# Altium PCB tx_mini.PcbDoc
Units mm, origin at the board's own origin, x right, y up, seen from the top; angles counter-clockwise.
Board outline 29 x 40 mm, 2 copper layers (Top Layer, Bottom Layer); 46 components, 36 nets, 197 pads, 47 vias.
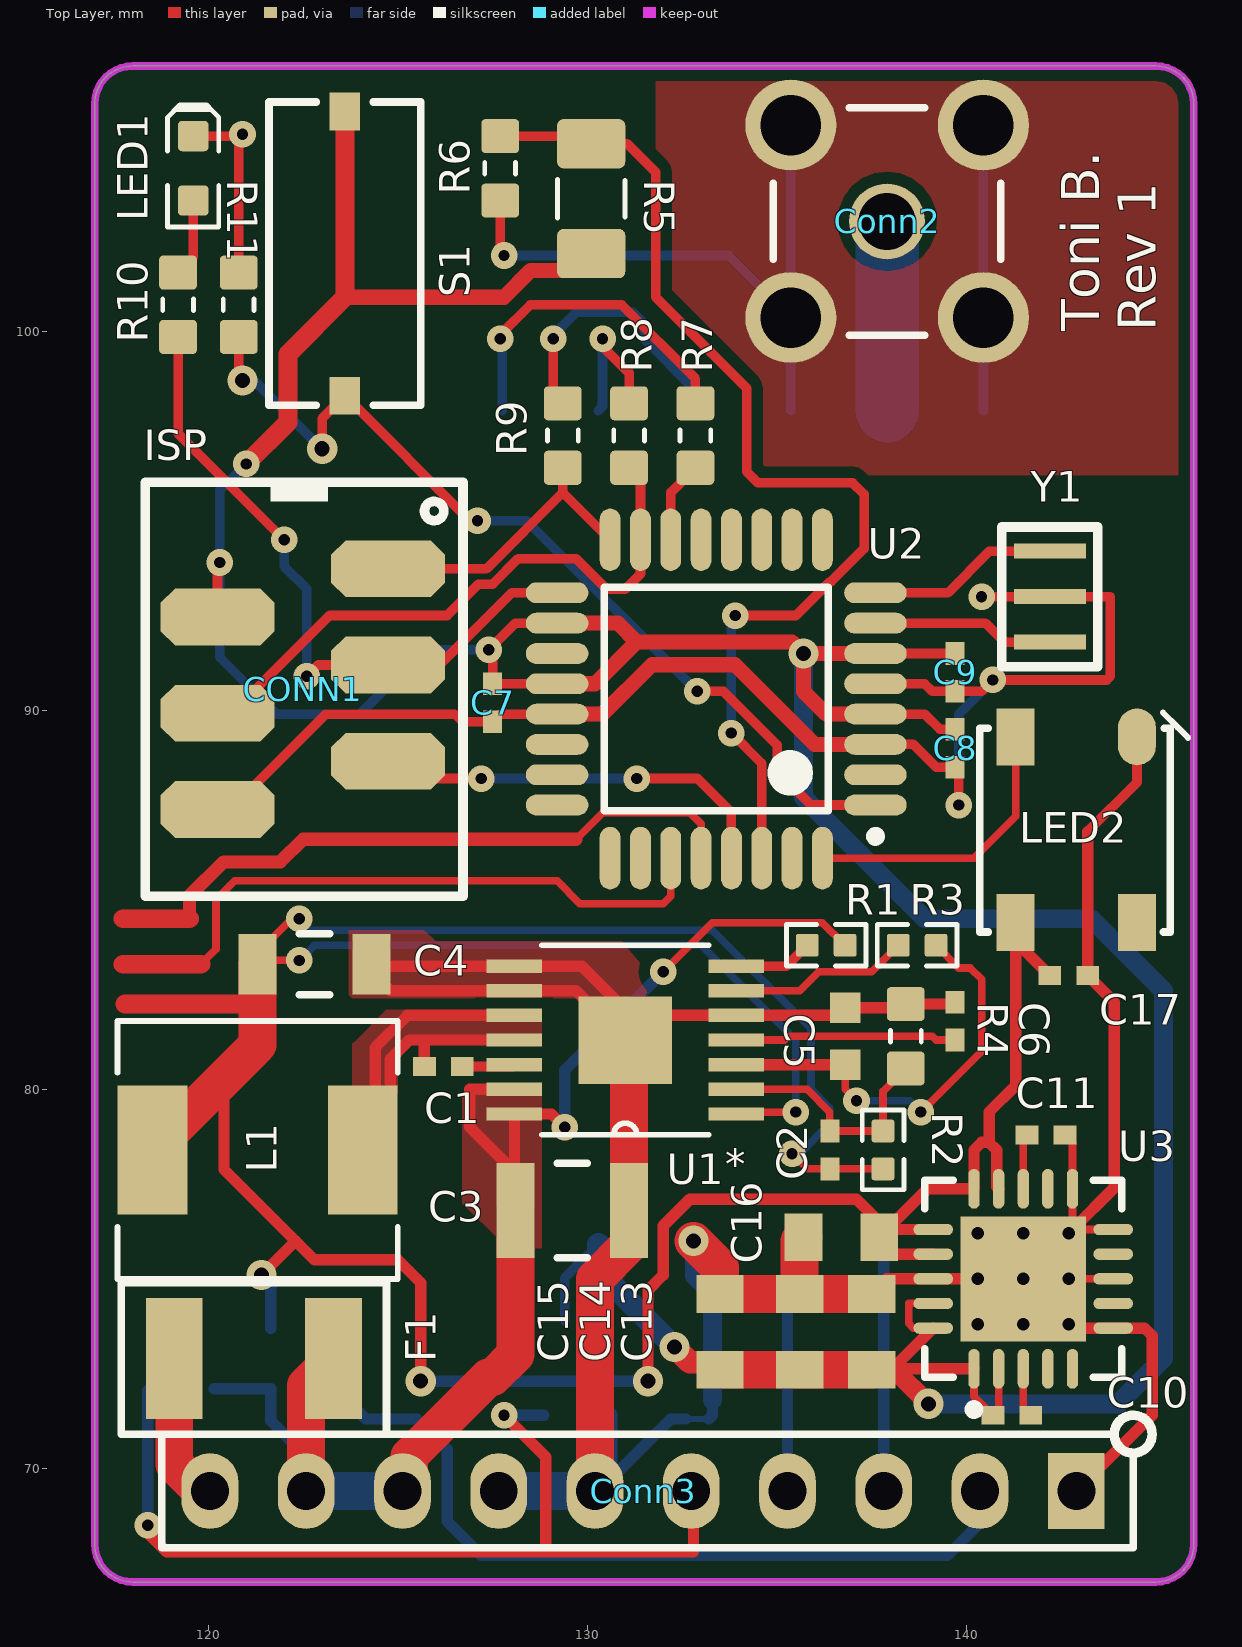
[diagram p0: Top Layer view]
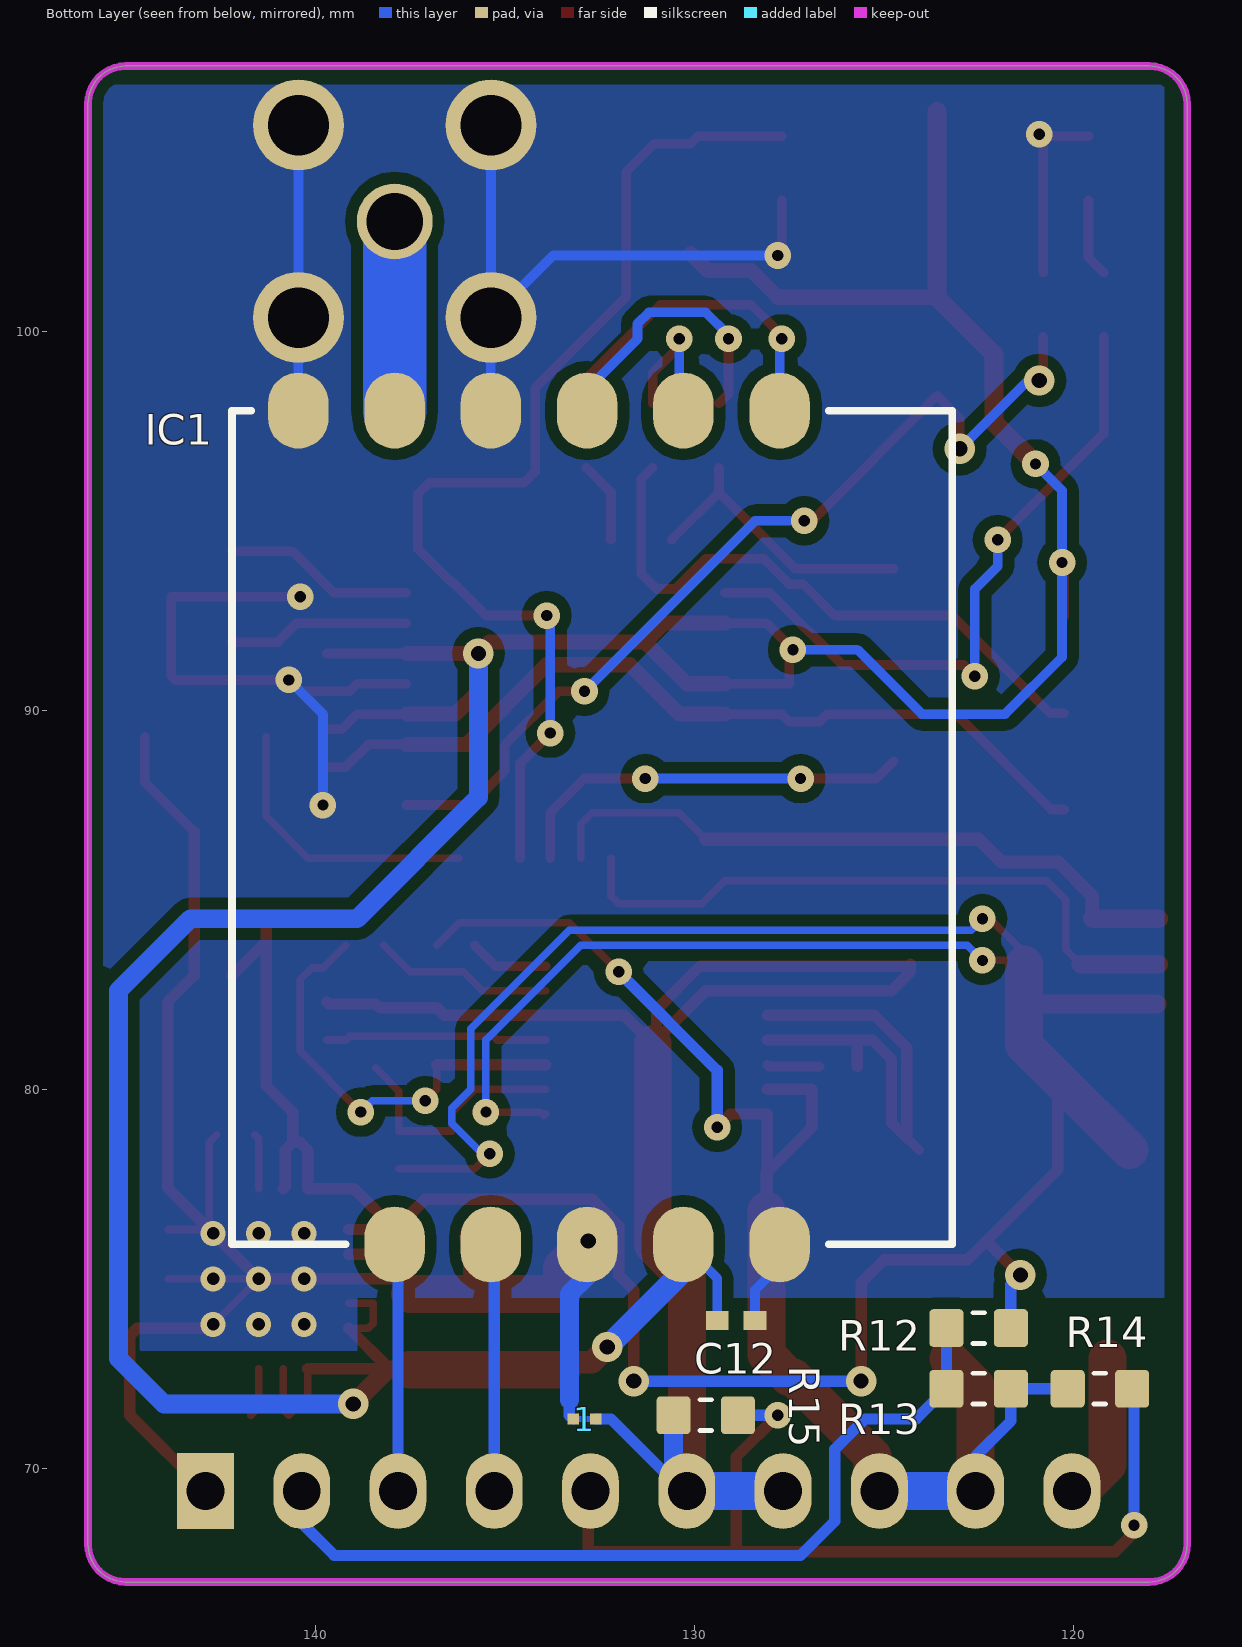
[diagram p1: Bottom Layer view, seen from below]
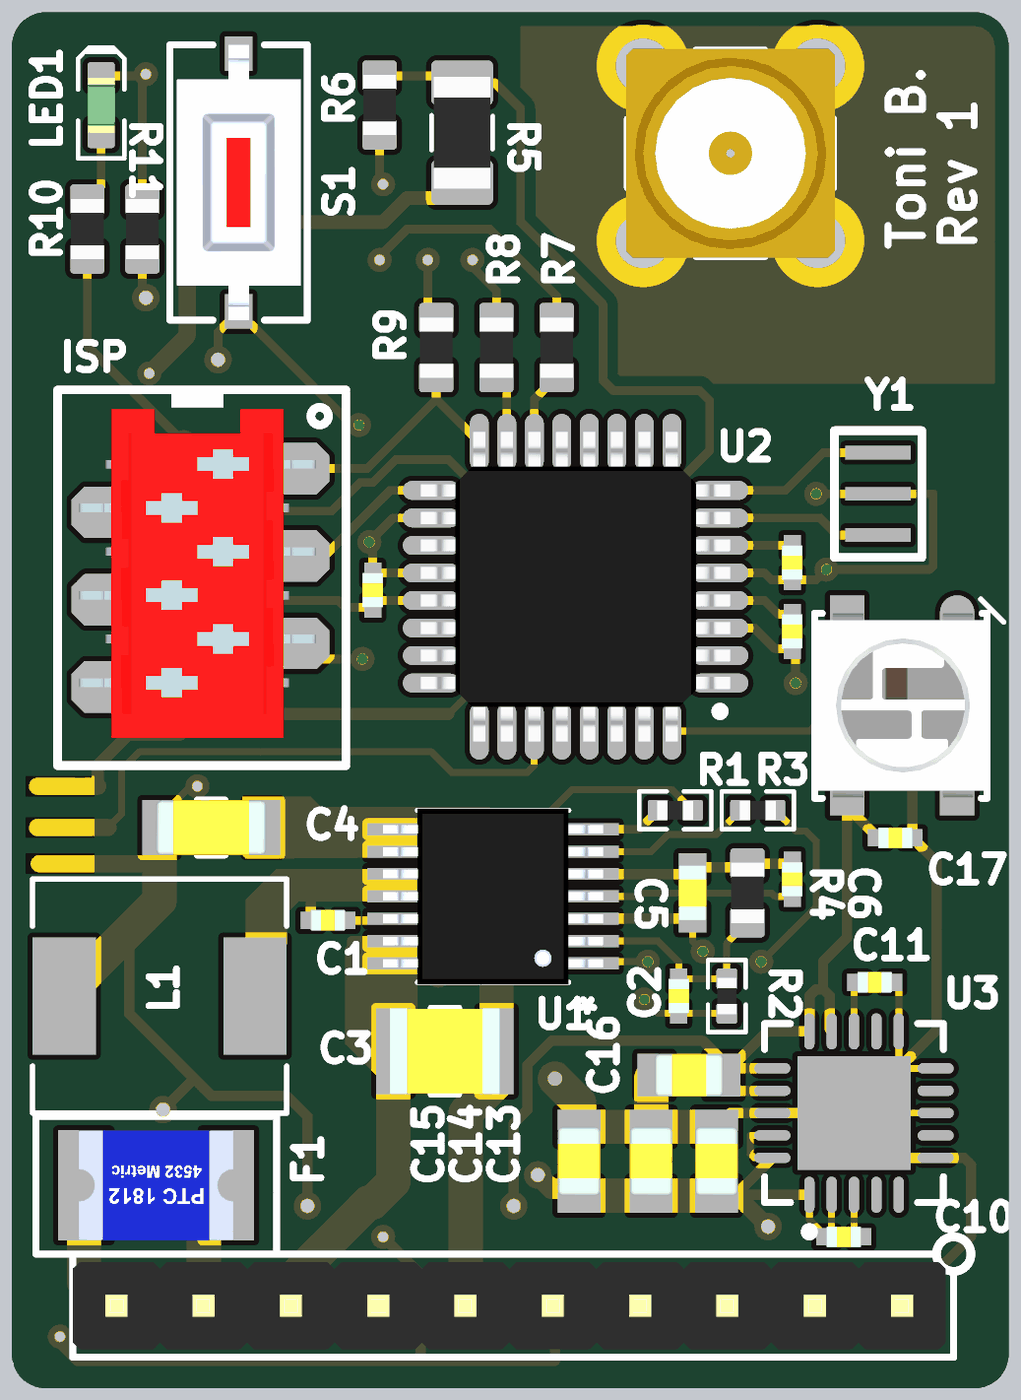
[diagram p2: 3D render of the assembled board from above, using the file's embedded part models]
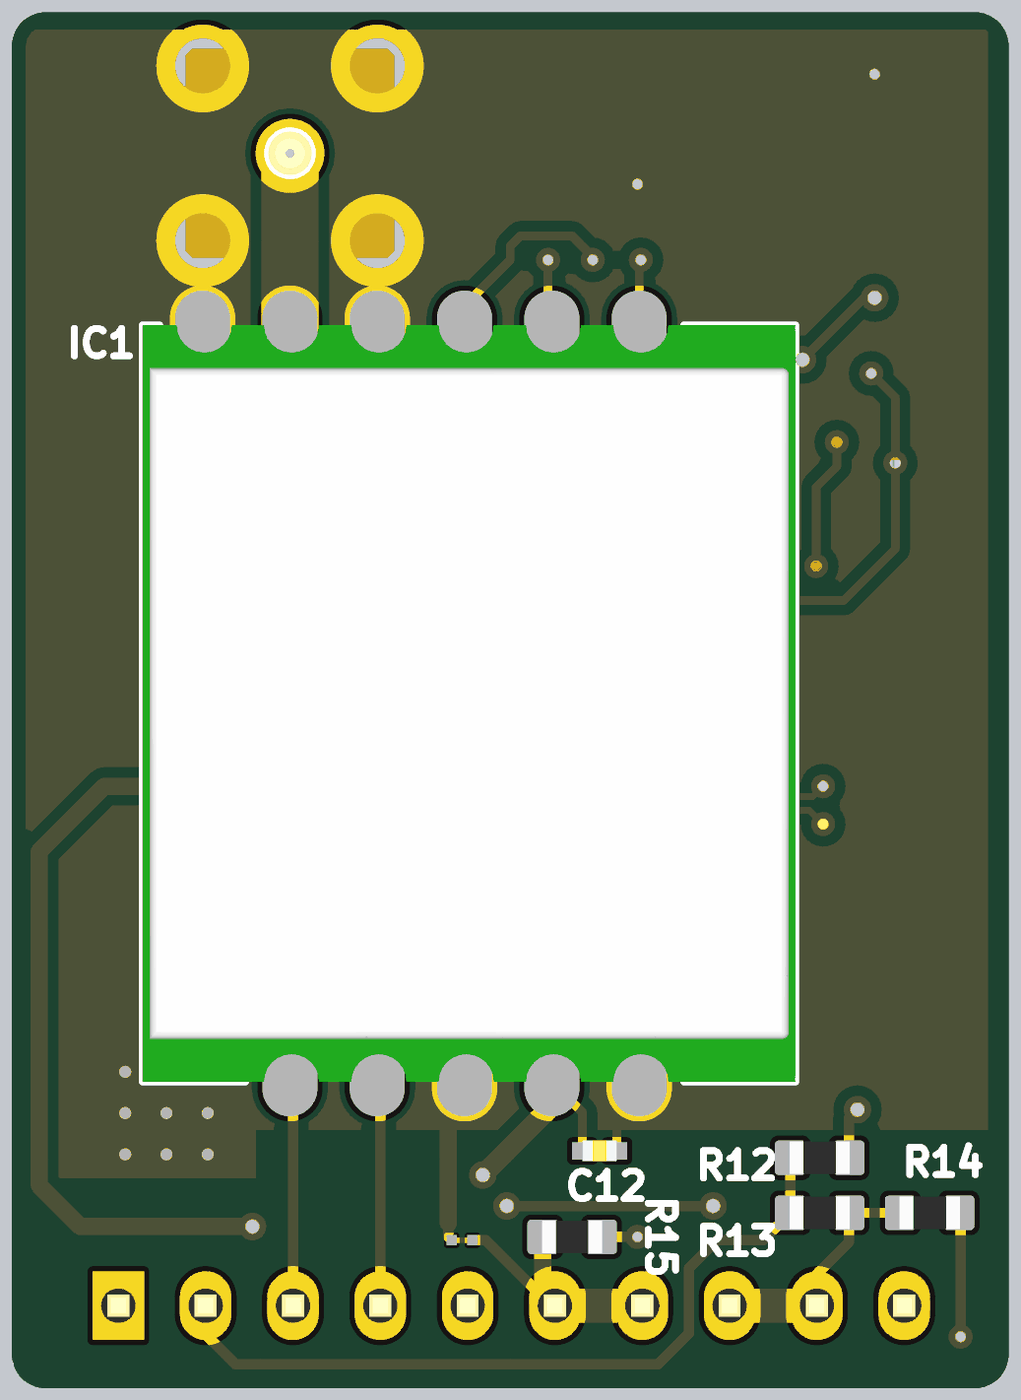
[diagram p3: 3D render of the assembled board from below, using the file's embedded part models]

## Layer stack, top to bottom
Top Solder: solder mask 0.0102, Solder Resist, Dk 3.5
Top Layer: signal copper 0.0356
Dielectric 1: dielectric 0.32, FR-4, Dk 4.8
Bottom Layer: signal copper 0.0356
Bottom Solder: solder mask 0.0102, Solder Resist, Dk 3.5

## Board outline
117,68 117,106 cw(c118,106) 118,107 145,107 cw(c145,106) 146,106 146,68 cw(c145,68) 145,67 118,67 cw(c118,68)

## Design rules (kind name [scope] priority, off if disabled: settings)
Clearance [All] p1: gap=0.152 except(0.3: Arc-Poly Track-Poly SMDPad-Poly THPad-Poly Via-Poly Fill-Poly Poly-Poly)
MinimumAnnularRing [All] p1: minimumring=0.15
PolygonConnect [All] p1: connectstyle=Direct reliefconductorwidth=0.254 reliefentries=4 polygonreliefangle="90 Angle" airgapwidth=0.254
RoomDefinition tx_mini_buck [InComponentClass('tx_mini_buck')] p1: confinementstyle=ConfineIn formatcopy=TRUE lockcomponents=FALSE outline 111.3,87.3 145.8,87.3 145.8,73.8 111.3,73.8
RoomDefinition tx_mini_uc_and_tx [InComponentClass('tx_mini_uc_and_tx')] p2: confinementstyle=ConfineIn formatcopy=TRUE lockcomponents=FALSE outline 149.8,64.4 115.4,64.4 115.4,108.331 149.8,108.331
RoutingVias [All] p1: holewidth=0.3 width=0.7 viastyle="Through Hole" minholewidth=0.3 minwidth=0.6 maxholewidth=1 maxwidth=1
SolderMaskExpansion [All] p1: expansion=0.15
Width [All] p1: maxlimit=2 minlimit=0.152 preferedwidth=0.254
30 further rules are at their usual default settings.

## Classes and differential pairs
component class tx_mini_buck: C1 C2 C3 C4 C5 C6 L1 R1 R2 R3 R4 U1
component class tx_mini_uc_and_tx: 1 C7 C8 C9 C10 C11 C12 C13 C14 C15 C16 C17 CONN1 Conn2 Conn3 F1 IC1 LED1 LED2 R5 R6 R7 R8 R9 R10 R11 R12 R13 R14 R15 S1 U2 U3 Y1

## Components (designator, comment, footprint, x,y, rotation, side; value= is the part's Value field where it differs from the comment)
1 "Net Tie" "Net Tie 0201" 132.9,71.3 r0 bottom net-tie
C1 "100nF" C0402 126.2,80.6 r180 top
C2 "10pF" C0402 136.4,78.4 r90 top
C3 "22uF" C1210 129.6,76.8 r0 top
C4 "22uF" C1206 122.8,83.3 r0 top
C5 "1uF" C0603 136.8,81.4 r90 top
C6 "10nF" C0402 139.7,81.8 r90 top
C7 "100nF" C0402 127.5,90.2 r270 top
C8 "100nF" C0402 139.7,89 r270 top
C9 "100nF" C0402 139.7,91 r270 top
C10 "10nF" C0402 141.2,71.4 r0 top
C11 "100nF" C0402 142.1,78.8 r0 top
C12 "100nF" C0402 128.9,73.9 r180 bottom
C13 "10uF" C0805 137.5,73.6 r90 top
C14 "10uF" C0805 135.6,73.6 r90 top
C15 "10uF" C0805 133.5,73.6 r90 top
C16 "10uF" C0805 136.7,76.1 r180 top
C17 "100nF" C0402 142.7,83 r0 top
CONN1 "ISP" "MICRO-MATCH SMD FTE 6" 122.4,88.4 r0 top
Conn2 "SMA" "SMA Straight" 137.906,102.9 r0 top
Conn3 "Pin Header 1x10" "Pin Header 1x10" 142.9,69.4 r270 top
F1 "PTC" "PTC 1812 (4532 metric)" 121.2,72.9 r180 top
IC1 "TX5823" Tx5823 140.45,75.907 r90 bottom
L1 "Inductance" SPM6530 121.3,78.4 r180 top
LED1 "LED" LED-0603-GREEN 119.6,104.3 r90 top
LED2 "WS2812B" WS2812B 144.5,89.3 r90 top
R1 "R" RES0402 136.3,83.8 r180 top
R2 "R" RES0402 137.8,78.4 r270 top
R3 "R" RES0402 138.7,83.8 r180 top
R4 "R" RES0603 138.4,81.4 r270 top
R5 "R" RES1206 130.1,103.5 r270 top
R6 "R" RES0603 127.7,104.3 r90 top
R7 "R" RES0603 132.85,97.25 r90 top
R8 "R" RES0603 131.1,97.25 r90 top
R9 "R" RES0603 129.35,97.25 r90 top
R10 "R" RES0603 119.2,100.7 r90 top
R11 "R" RES0603 120.8,100.7 r270 top
R12 "R" RES0603 122.5,73.7 r0 bottom
R13 "R" RES0603 122.5,72.1 r0 bottom
R14 "R" RES0603 119.3,72.1 r0 bottom
R15 "R" RES0603 129.7,71.4 r180 bottom
S1 "SW-PB" "pushbutton micro switch" 123.6,98.3 r90 top
U1 "TPS54225PWP" R-PDSO-G14 131,81.3 r180 top
U2 "ATmega328P-AU" 32A_N 133.4,90.3 r180 top
U3 "TPS7A8300RGWR" RGW20_N 141.5,75 r90 top
Y1 "Ceramic Resonators CSTCE" CSTCE 142.2,94.2 r0 top

## Footprints (in the part's own frame and the unit in brackets; to place one, negate y for a bottom-side part, rotate by r counter-clockwise, add the part's x,y. Pads: shape width x height; smd on the part's side, far side on the other; paste and mask are expansions set on the pad)
32A_N [mm] "Thin QFP, 32-Leads, Body 7x7mm, Pitch 0.8mm, IPC Medium Density (Atmel)"
  oval 1.65x0.55 smd: 1(-4.2,2.8) 2(-4.2,2) 3(-4.2,1.2) 4(-4.2,0.4) 5(-4.2,-0.4) 6(-4.2,-1.2) 7(-4.2,-2) 8(-4.2,-2.8) 17(4.2,-2.8) 18(4.2,-2) 19(4.2,-1.2) 20(4.2,-0.4) 21(4.2,0.4) 22(4.2,1.2) 23(4.2,2) 24(4.2,2.8)
  oval 0.55x1.65 smd: 9(-2.8,-4.2) 10(-2,-4.2) 11(-1.2,-4.2) 12(-0.4,-4.2) 13(0.4,-4.2) 14(1.2,-4.2) 15(2,-4.2) 16(2.8,-4.2) 25(2.8,4.2) 26(2,4.2) 27(1.2,4.2) 28(0.4,4.2) 29(-0.4,4.2) 30(-1.2,4.2) 31(-2,4.2) 32(-2.8,4.2)
  silkscreen extent -4.33,-2.95 2.95,3.75, body extent -4.5,-4.5 4.5,4.5, height 1.45
C0402 [mm] "Chip Capacitor, Body 1.0x0.5mm, IPC High Density"
  rect 0.6x0.5 smd: 1(-0.5,0) 2(0.5,0)
  body extent -0.5,-0.3 0.5,0.3, height 0.2
C0603 [mm] "Chip Capacitor, Body 1.6x0.8mm, IPC Medium Density"
  rect 0.8x0.8 smd: 1(-0.75,0) 2(0.75,0)
  body extent -0.8,-0.4 0.8,0.4, height 0.3
C0805 [mm] "Chip Capacitor, Body 2.0x1.3mm, IPC Medium Density"
  rect 1x1.25 smd: 1(-1,0) 2(1,0)
  body extent -1,-0.62 1,0.63, height 0.78
C1206 [mm] "Chip Capacitor, Body 3.2x1.6mm, IPC Medium Density"
  rect 1x1.6 smd: 1(-1.5,0) 2(1.5,0)
  silkscreen extent -0.4,-0.8 0.4,0.8, body extent -1.6,-0.8 1.6,0.8, height 1
C1210 [mm] "Chip Capacitor, Body 3.2x2.5mm, IPC Medium Density"
  rect 1x2.5 smd: 1(-1.5,0) 2(1.5,0)
  silkscreen extent -0.4,-1.25 0.4,1.25, body extent -1.6,-1.25 1.6,1.25, height 0.92
CSTCE [mm] "Ceramic Resonators (CERALOCK)"
  rect 1.9x0.4 smd: 1(0,0) 2(0,-1.2) 3(0,-2.4)
  silkscreen extent -1.27,-3.05 1.27,0.64, body extent -0.64,-2.79 0.64,0.38, height 0.9
LED-0603-GREEN [mm]
  round 0.254 on Mech15: 0(0,0)
  rrect25% 0.8x0.8 smd: A(-0.85,0) K(0.85,0)
  Top Layer pour cut-out: -0.5,0.5 0.5,0.5 0.5,-0.5 -0.5,-0.5
  silkscreen extent -1.55,-0.67 1.68,0.67, body extent -0.8,-0.4 0.8,0.4, height 0.75
"MICRO-MATCH SMD FTE 6" [mm]
  oct 3x1.5 smd: 1(2.341,5.334) 2(-2.159,4.064) 3(2.341,2.794) 4(-2.159,1.524) 5(2.341,0.254) 6(-2.159,-1.016)
  silkscreen extent -4.06,-3.3 4.32,7.62, body extent -3.45,-2.49 3.45,7.06, height 5.25
"Net Tie 0201" [mm] "Net Tie with 0201 reflow soldering footprint"
  rect 0.3x0.3 smd paste+0 mask+0.075: 1(-0.3,0) 2(0.3,0)
  Top Layer lines w0.16: -0.3,0 0.3,0
"Pin Header 1x10" [mm]
  rect 2x1.5 / inner rect 1.5x1.5 / far side rect 2x1.5 hole 1: 1(0,0)
  oval 2x1.5 / inner round 1.5 / far side oval 2x1.5 hole 1: 2(0,-2.54)
  oval 2x1.5 hole 1: 3(0,-5.08) 4(0,-7.62) 5(0,-10.16) 6(0,-12.7) 7(0,-15.24) 8(0,-17.78) 9(0,-20.32) 10(0,-22.86)
  silkscreen extent -2,-24.13 1.5,2, body extent -1.27,-24.13 1.27,1.27, height 8.54
"PTC 1812 (4532 metric)" [mm]
  rect 1.5x3.2 smd: 1(-2.1,0) 2(2.1,0)
  silkscreen extent -3.5,-2 3.5,2, body extent -2.25,-1.6 2.25,1.6, height 1.4
"pushbutton micro switch" [mm] "3x6x2.5mm Momentary Tact SMD SMT Pushbutton Micro Switch 2 Pin"
  rect 1x0.8 smd: 1(0,0) 2(7.5,0)
  silkscreen extent -0.25,-2 7.75,2, body extent -0.25,-1.8 7.75,1.8, height 2.4
R-PDSO-G14 [mm]
  rect 1.461x0.351 smd: 1(-2.925,1.95) 2(-2.925,1.3) 3(-2.925,0.65) 4(-2.925,0) 5(-2.925,-0.65) 6(-2.925,-1.3) 7(-2.925,-1.95) 8(2.925,-1.95) 9(2.925,-1.3) 10(2.925,-0.65) 11(2.925,0) 12(2.925,0.65) 13(2.925,1.3) 14(2.925,1.95)
  rect 2.46x2.31 smd paste-1.217: 15(0,0)
  silkscreen extent -2.2,-2.5 2.2,2.5, body extent -3.2,-2.55 3.2,2.55, height 1.2
RES0402 [mm] "Chip Resistor, Body 1.0x0.5mm, EIA 0402, IPC Medium Density"
  round 0.2 on Mech15: 0(0,0)
  rrect20% 0.6x0.6 smd: 1(-0.5,0) 2(0.5,0)
  Top Layer pour cut-out: -0.325,0.375 -0.2,0.5 0.2,0.5 0.325,0.375 0.325,-0.375 0.2,-0.5 -0.2,-0.5 -0.325,-0.375
  silkscreen extent -1.05,-0.55 1.05,0.55, body extent -0.52,-0.27 0.53,0.28, height 0.4
RES0603 [mm] "Chip Resistor, Body 1.6x0.8mm, EIA 0603, IPC Medium Density"
  round 0.254 on Mech15: 0(0,0)
  rrect25% 0.9x1 smd: 1(-0.85,0) 2(0.85,0)
  Top Layer pour cut-out: -0.6,0.5 -0.4,0.7 0.4,0.7 0.6,0.5 0.6,-0.5 0.4,-0.7 -0.4,-0.7 -0.6,-0.5
  silkscreen extent -0.15,-0.41 0.15,0.41, body extent -0.87,-0.47 0.88,0.48, height 0.54
RES1206 [mm] "Chip Resistor, Body 3.2x1.6mm, EIA 1206, IPC Medium Density"
  round 0.508 on Mech15: 0(0,0)
  rrect25% 1.3x1.8 smd: 1(-1.45,0) 2(1.45,0)
  silkscreen extent -0.51,-0.89 0.51,0.89, body extent -1.62,-0.82 1.63,0.83, height 0.69
RGW20_N [mm] "20-Pin Plastic Quad Flat No-Lead 0.65 mm Pitch, IPC Medium Density"
  oval 1.05x0.3 smd: 1(-2.375,1.3) 2(-2.375,0.65) 3(-2.375,0) 4(-2.375,-0.65) 5(-2.375,-1.3) 11(2.375,-1.3) 12(2.375,-0.65) 13(2.375,0) 14(2.375,0.65) 15(2.375,1.3)
  oval 0.3x1.05 smd: 6(-1.3,-2.375) 7(-0.65,-2.375) 8(0,-2.375) 9(0.65,-2.375) 10(1.3,-2.375) 16(1.3,2.375) 17(0.65,2.375) 18(0,2.375) 19(-0.65,2.375) 20(-1.3,2.375)
  rect 3.3x3.3 smd: 21(0,0)
  silkscreen extent -3.57,-2.6 2.6,2.6, body extent -2.58,-2.58 2.58,2.58, height 1
"SMA Straight" [mm]
  round 2.4 hole 1.6: 1(-2.54,-2.54) 1(-2.54,2.54) 1(2.54,-2.54) 1(2.54,2.54)
  round 2 hole 1.5: 2(0,0)
  silkscreen extent -3,-3 3,3, body extent -3.04,-3.04 3.04,3.04, height 9
SPM6530 [mil]
  rect 72.5x134 smd: 1(-109.25,0) 2(109.25,0)
  silkscreen extent -146,-134 146,134, body extent -140,-128 140,128, height 118
Tx5823 [mm]
  oval 2x1.6 smd: 1(0,-2.54) 2(0,-5.08) 3(0,-7.62) 4(0,-10.16) 5(0,-12.7) 6(22,-12.7) 7(22,-10.16) 8(22,-7.62) 9(22,-5.08) 10(22,-2.54) 11(22,0)
  silkscreen extent 0,-17.25 22,1.75, body extent 0,-17.25 22,1.75, height 3
WS2812B [mm]
  rect 1.5x1 smd: 1(-4.9,3.2) 2(-4.9,0) 4(0,3.2)
  oval 1.5x1 smd: 3(0,0)
  silkscreen extent -5.15,-1.35 0.64,4.15, body extent -5.12,-0.9 0.23,4.05, height 1.7

## Part data
C1 C7 C8 C9 C11 C12 C17: library part "C 100nF 0402", "Capacitor"
C2 C3 C4 C5 C6 C10 C13 C14 C15 C16: library part C, "Capacitor"
CONN1: library part "Micromatch 02x03 SMD", "Micromatch"
L1: library part "L power", "Power Inductance"
LED2: "RGB LED with serial in and out"
R1 R2 R3 R4 R5 R6 R7 R8 R9 R10 R11 R12 R13 R14 R15: "Resistor"
S1: "Switch"
U1: "TPS54325PWPR"
U2: "8-bit AVR Microcontroller, 32KB Flash, 1KB EEPROM, 2KB SRAM, 32-pin TQFP, Industrial Grade (-40°C to 85°C)"
U3: "Imported"

## Via types
v1: diameter 0.7, hole 0.3, Top Layer to Bottom Layer, tented both sides, 29 vias
v2: diameter 0.66, hole 0.33, Top Layer to Bottom Layer, tented both sides, 9 vias
v3: diameter 0.8, hole 0.4, Top Layer to Bottom Layer, tented both sides, 9 vias

## Nets (pads, with @x,y where several pads share a name; then routed paths per layer and width w, separated by ;. In a path a pad name is that pad's centre, name@x,y a point inside that pad or via, vN(x,y) a via of type N, cw(c..) or ccw(c..) an arc to the next point about the centre after c; other vN are vias at no path point)
3,3V: C7.1 C8.1 C9.1 C10.1 C12.1 C13.1 C14.1 C15.1 CONN1.2 IC1.4 R5.2 S1.2 U2.4 U2.6 U2.18 U2.20 U3.1 U3.2 U3.19 U3.20 | length 110
  Top Layer w0.2: U3.20 138.6,73.7 138.475,73.825 138.475,74.35 U3.19 ; U3.1 140.2,71.9 C10.1 140.85,71.55 U3.2
  Top Layer w0.254: CONN1.2 120.241,93.841 v1(120.3,93.9) ; U2.20 C7.1 127.5,91.5 v1(127.4,91.6) 128.1,92.3 U2.18 ; U2.4 138.9,89.9 139.3,89.5 C8.1 ; U2.6 C9.1
  Top Layer w0.3: C13.1 137.525,72.625 C13.1@138.05,72.625 ; U3.20 C13.1@138.05,72.625 ; U3.1 C13.1@138.05,72.625
  Top Layer w0.4: 123.6,100.9 127.8,100.9 128.5,101.6 129.65,101.6 R5.2 ; U2.20 130.2,90.7 131.3,91.8 ; U2.18 130.8,92.3 131.3,91.8 ; U2.4 136.3,89.9 135.7,90.5 v3(135.7,91.5) ; U2.6 v3(135.7,91.5) ; 131.3,91.8 131.302,91.798 135.402,91.798 v3(135.7,91.5)
  Top Layer w0.5: v1(121,96.5) 122.1,97.6 122.1,99.4 123.6,100.9 S1.2 ; C13.1 138.1,72.6 v3(139,71.7)
  Top Layer w0.6: v3(132.3,73.2) 132.7,72.8 133.3,72.8 C15.1
  Top Layer w1: C15.1 C14.1 C13.1
  Bottom Layer w0.254: v1(121,96.5) 120.3,95.8 v1(120.3,93.9) 120.3,91.4 121.8,89.9 124,89.9 125.7,91.6 v1(127.4,91.6) ; C12.1 129.4,75.017 IC1.4
  Bottom Layer w0.5: v3(135.7,91.5) 135.7,87.7 138.9,84.5 143.3,84.5 145.2,82.6 145.2,72.9 144,71.7 v3(139,71.7)
  Bottom Layer w0.6: IC1.4 130.29,75.21 v3(132.3,73.2)
5V: C2.1 C4.1 C16.1 C17.1 L1.2 LED2.1 R2.2 R12.1 U1.1 U3.14 U3.15 U3.16 U3.17 | length 98.9
  Top Layer w0.2: v1(122.4,83.4) 121.4,83.4 C4.1 121.3,83.6 122.4,84.7 v1(122.4,84.5) ; U1.1 133.975,79.3 134.075,79.4 v1(135.5,79.4) ; v1(135.4,78.3) 135.8,77.9 C2.1 R2.2
  Top Layer w0.3: 120.413,80.287 120.413,77.887 122.3,76 ; v3(121.4,75.1) 122.3,76 ; v3(125.6,72.3) 125.6,74.9 125,75.5 122.8,75.5 122.3,76 ; v3(131.6,72.3) 131.598,72.302 131.598,74.698 131.998,75.098 131.998,76.332 132,76.335 132,76.4 132.7,77.1 137.1,77.1 C16.1@137.9,76.3 ; U3.17 138.15,75.65 C16.1 C16.1@137.9,76.3 ; U3.16 C16.1@137.9,76.3 ; U3.14 140.8,77.425 140.8,78.4 140.6,78.6 ; LED2.1 LED2.1@141.3,83.9 ; C17.1 LED2.1@141.3,83.9 ; C16.1@137.9,76.3 138.975,77.375 U3.15 140.2,78.4 140.4,78.6 140.6,78.6 ; 140.6,78.6 140.6,79.4 141.3,80.1 LED2.1@141.3,83.9
  Top Layer w0.5: 117.8,82.25 121.3,82.25
  Top Layer w1: L1.2 120.413,80.287 121.3,81.175 121.3,82.25 C4.1
  Bottom Layer w0.2: v1(122.4,83.4) 122.8,83.8 133,83.8 135.5,81.3 v1@135.5,79.4 ; v1(122.4,84.5) 122.7,84.2 133.3,84.2 135.9,81.6 135.9,80 136.4,79.5 136.4,79.1 135.6,78.3 v1(135.4,78.3)
  Bottom Layer w0.3: v3(121.4,75.1) 121.65,74.85 R12.1 ; v3(125.6,72.3) v3(131.6,72.3)
AUDIO: Conn3.4 IC1.2 | length 6.5
  Bottom Layer w0.3: Conn3.4 135.28,75.817 IC1.2
BATT+: C3.1 Conn3.8 Conn3.9 F1.1 R1.1 R13.1 R14.2 U1.13 U1.14 | length 39.3
  Top Layer w0.2: v1(132,83.1) 133.3,84.4 136.2,84.4 R1.1
  Top Layer w0.3: U1.13 126.9,80 126.9,79 C3.1@128.075,77.825 ; v1(129.4,79) 129.05,79.35 U1.14 C3.1@128.075,77.825 ; C3.1@128.075,77.825 128.1,77.8 C3.1 128.075,76.825 C3.1@128.075,77.825
  Top Layer w1: Conn3.9 122.58,72.18 F1.1 ; Conn3.8 125.3,69.58 125.3,70.318 127.385,72.402 127.502,72.402 128.1,73 C3.1
  Bottom Layer w0.3: R14.2 R13.1 121.65,71.25 122.58,70.32 Conn3.9 ; v1(129.4,79) 129.4,80.5 v1(132,83.1)
  Bottom Layer w1: Conn3.9 Conn3.8
"CH1 SPI_DATA": R7.1 U2.14 | length 2.2
  Top Layer w0.254: U2.14 132.2,95.75 R7.1
"CH2 SPI_SEL": CONN1.4 R8.1 U2.15 | length 16.3
  Top Layer w0.254: CONN1.4 120.624,89.924 123.2,92.5 126.3,92.5 127.128,93.328 127.502,93.328 128.175,94 129.7,94 130.5,93.2 131,93.2 131.4,93.6 U2.15 131.4,96.1 R8.1
"CH3 SPI_CLK": CONN1.1 R9.1 U2.16 | length 8.5
  Top Layer w0.254: CONN1.1 127.334,93.734 129.35,95.75 ; U2.16 129.35,95.75 ; 129.35,95.75 R9.1 129.35,95.75
GND: 1.2 C7.2 C8.2 C9.2 C11.2 C12.2 C13.2 C14.2 C15.2 C16.2 C17.2 CONN1.6 Conn2.1 Conn3.1 IC1.3 IC1.5 IC1.9 IC1.11 LED1.K LED2.3 R6.1 R11.1 U2.3 U2.5 U2.21 U3.6 U3.8 U3.10 U3.11 U3.18 U3.21 Y1.2 | length 120.3
  Top Layer w0.2: C11.2 142.8,78.6 U3.11 U3.21@142.8,76.3 ; U3.21@142.8,73.7 v2(142.7,73.8) v2(141.5,75) ; U3.8 v2(142.7,75) v2(141.5,75) ; U3.10 U3.21@142.8,76.3 ; v2(141.5,75) v2(142.7,76.2) U3.21@142.8,76.3
  Top Layer w0.254: LED1.K v1@120.85,105.15 ; CONN1.6 120.584,87.384 123.1,89.9 126.5,89.9 126.7,89.7 C7.2 127.7,89.9 U2.21 ; R11.1 120.8,105.1 v1@120.85,105.15 ; v1(120.9,105.2) v1@120.85,105.15 ; R6.1 127.7,102 v1(127.8,102) ; U2.3 138.6,89.1 139.2,88.5 C8.2 139.8,88.4 v1(139.8,87.5) ; U2.5 138.9,90.7 139.1,90.5 C9.2 140.4,90.5 v1(140.7,90.8) 143.7,90.8 143.8,90.9 143.8,93 Y1.2 v1(140.4,93) ; 143.2,86.8 144.5,88.1 LED2.3
  Top Layer w0.3: C13.2 137.9,75 U3.18 v2(140.3,75) v2(141.5,75) 142.8,76.3 143.9,77.4 143.9,82.3 C17.2 143.2,86.8 ; U3.21@142.8,73.7 U3.6 144.7,73.7 144.9,73.5 144.9,71.4 Conn3.1
  Top Layer w0.4: U2.21 130.4,89.9 131.702,91.202 133.898,91.202 136,89.1 U2.3
  Top Layer w1: v3(132.8,76) 133.5,75.3 C15.2 C14.2 ; C16.2 135.6,76 C14.2 ; C13.2 C14.2
  Bottom Layer w0.254: IC1.5 127.75,75.35 128.4,74.7 C12.2 ; v1(127.8,102) 133.726,102 Conn2.1@135.366,100.36 ; Conn2.1@135.366,105.44 Conn2.1@135.366,100.36 ; IC1.9 135.37,100.356 Conn2.1@135.366,100.36 ; v1(139.8,87.5) 139.8,89.9 v1(140.7,90.8) ; Conn2.1@140.446,105.44 140.446,100.36 140.45,100.356 IC1.11
  Bottom Layer w0.3: 1.2 133.3,71.4 133.3,71.8
  Bottom Layer w0.5: IC1.3 132.83,75.07 133.3,74.6 133.3,71.8
  other v2: 140.3,73.8 141.5,73.8 140.3,76.2 141.5,76.2
NetC1_1: C1.1 U1.12 | length 1.4
  Top Layer w0.254: C1.1 128.025,80.6 U1.12
NetC1_2: C1.2 L1.1 U1.10 U1.11 | length 13.3
  Top Layer w0.254: L1.1 L1.1@124.4,78.725
  Top Layer w0.3: C1.2 125.7,81.3 ; U1.11 125.7,81.3 ; U1.10 125.25,81.95 124.4,81.1 124.4,78.725 124.8,79.125 124.8,80.8 125.3,81.3 125.7,81.3
NetC2_2: C2.2 R2.1 R4.2 U1.2 | length 6.5
  Top Layer w0.2: U1.2 133.927,80.002 135.798,80.002 136.4,79.4 C2.2 R2.1 137.8,79.1 137.8,79.95 R4.2
NetC5_1: C5.1 R3.1 U1.3 | length 11.5
  Top Layer w0.2: C5.1 136.8,80 v1(137.1,79.7) ; v1(138.8,79.4) 140.4,81 140.4,82.9 140.1,83.2 139.8,83.2 R3.1
  Top Layer w0.3: U1.3 C5.1
  Bottom Layer w0.2: v1(137.1,79.7) 138.5,79.7 v1(138.8,79.4)
NetC6_1: C6.1 U1.4 | length 5.9
  Top Layer w0.2: U1.4 135.2,81.3 135.3,81.4 139.1,81.4 139.2,81.3 C6.1
NetC10_2: C10.2 U3.3 | length 1.3
  Top Layer w0.2: U3.3 141.5,71.6 C10.2
NetC11_1: C11.1 U3.13 | length 1.5
  Top Layer w0.2: U3.13 141.5,78.7 C11.1
NetConn2_2: Conn2.2 IC1.10 | length 5
  Bottom Layer w0.254: Conn2.2 Conn2.2@137.91,102.896
  Bottom Layer w1.67: IC1.10 Conn2.2@137.91,102.896
NetConn3_2: Conn3.2 R12.2 R13.2 | length 22.7
  Bottom Layer w0.3: R12.2 R13.2 124.15,71.3 125.5,71.3 126.3,70.5 126.3,68.6 127.2,67.7 139.5,67.7 140.36,68.56 Conn3.2
NetConn3_5: Conn3.5 R14.1 R15.2 | length 25.2
  Top Layer w0.3: v1(118.4,68.5) 118.4,68.3 118.9,67.8 128.9,67.8 ; v1(127.8,71.4) 128.9,70.3 128.9,67.8 ; Conn3.5 132.8,69.34 132.8,67.8 128.9,67.8
  Bottom Layer w0.3: v1(118.4,68.5) 118.4,72.05 R14.1 ; v1(127.8,71.4) R15.2
NetConn3_10: Conn3.10 F1.2 | length 4.1
  Top Layer w1: F1.2 119.1,70.1 119.8,69.4 Conn3.10
  Bottom Layer w1: Conn3.10 Conn3.10@120.1,69.46
NetIC1_6: IC1.6 R7.2 | length 9.3
  Top Layer w0.254: v1(127.7,99.8) 127.7,99.9 128.5,100.7 130.9,100.7 132.85,98.75 R7.2
  Bottom Layer w0.254: v1(127.7,99.8) 127.7,99.9 127.75,99.95 IC1.6
NetIC1_7: IC1.7 R8.2 | length 3.5
  Top Layer w0.254: v1@130.4,99.6 131.1,98.9 R8.2
  Bottom Layer w0.254: IC1.7 130.4,98.017 v1@130.4,99.6
  other v1: 130.4,99.8
NetIC1_8: IC1.8 R9.2 | length 7.5
  Top Layer w0.254: v1@129.1,99.7 129.1,98.35 R9.2
  Bottom Layer w0.254: v1@129.1,99.7 129.1,99.9 129.7,100.5 131.2,100.5 131.5,100.2 131.5,99.8 132.83,98.47 IC1.8
  other v1: 129.1,99.8
NetLED1_A: LED1.A R10.2 | length 2.1
  Top Layer w0.254: R10.2 119.6,101.95 LED1.A
NetR1_2: R1.2 U1.7 | length 2.1
  Top Layer w0.254: U1.7 135.25,83.25 R1.2
NetR3_2: R3.2 U1.6 | length 4.8
  Top Layer w0.2: U1.6 135.6,82.6 136.1,83.1 137.5,83.1 R3.2
NetR5_1: R5.1 R6.2 U2.30 | length 29.1
  Top Layer w0.254: R6.2 129.9,105.15 R5.1 131.05,104.95 131.8,104.2 131.8,100.9 134.2,98.5 134.2,96.3 134.5,96 137,96 137.3,95.7 137.3,94.266 136.43,93.396 136.396,93.396 135.5,92.5 v1(133.9,92.5) ; v1(133.8,89.4) 134.6,88.6 U2.30
  Bottom Layer w0.254: v1(133.8,89.4) 133.8,92.4 v1(133.9,92.5)
NetR11_2: R11.2 S1.1 U2.1 | length 24.6
  Top Layer w0.254: R11.2 120.8,98.8 v3(120.9,98.7) ; v3(123,96.9) 123,97.7 S1.1 126.9,95 v1(127.1,95) ; v1(132.9,90.5) 133.59,90.5 135.006,89.084 135.006,88.394 135.9,87.5 U2.1
  Bottom Layer w0.254: v3(120.9,98.7) 121.2,98.7 v3(123,96.9) ; v1(127.1,95) 128.4,95 v1(132.9,90.5)
NetU2_7: U2.7 Y1.3 | length 4.8
  Top Layer w0.254: U2.7 140.5,92.3 141,91.8 Y1.3
NetU2_8: U2.8 Y1.1 | length 5.1
  Top Layer w0.254: U2.8 139.51,93.1 140.61,94.2 Y1.1
PGND: 1.1 C3.2 C4.2 C5.2 C6.2 Conn3.6 Conn3.7 R4.1 R15.1 U1.5 U1.8 U1.9 U1.15 | length 44.5
  Top Layer w0.3: C6.2 139.65,82.25 R4.1 138.3,82.15 C5.2 136.6,81.95 U1.5 131.85,81.95 131.1,81.2 U1.15 ; U1.15 131,82.1 129.85,83.25 U1.8 124.35,83.25 C4.2 124.3,83.1 124.8,82.6 U1.9 129.7,82.6 U1.15
  Top Layer w1: Conn3.6 130.2,75 131.1,75.9 C3.2 U1.15@131.1,81.2
  Bottom Layer w0.3: Conn3.6 130.3,69.4 130.55,69.65 132.2,71.3 1.1
  Bottom Layer w0.5: Conn3.6@130.55,69.65 R15.1
  Bottom Layer w1: Conn3.7 Conn3.6
RST: CONN1.5 U2.29 | length 10.8
  Top Layer w0.254: CONN1.5 125.195,88.2 v1(127.2,88.2) ; v1(131.3,88.2) 132.9,88.2 133.8,87.3 U2.29
  Bottom Layer w0.254: v1(127.2,88.2) v1(131.3,88.2)
SCK: CONN1.3 R10.1 U2.17 | length 17.9
  Top Layer w0.254: R10.1 119.2,97.3 v1(122,94.5) ; v1(122.6,90.9) 122.894,91.194 CONN1.3 126.094,91.194 128,93.1 U2.17
  Bottom Layer w0.254: v1(122,94.5) 122,93.8 122.6,93.2 v1(122.6,90.9)
SCL: U2.28 | length 17.8
  Top Layer w0.2: 129.7,86.6 130.4,87.3 132.7,87.3 133,87 U2.28
  Top Layer w0.35: 119.5,84.5 119.5,85.1 120.4,86 121.9,86 122.5,86.6 129.7,86.6
  Top Layer w0.5: 117.75,84.5 119.5,84.5
SDA: U2.27 | length 17.5
  Top Layer w0.2: 119.8,83.3 120.2,83.7 120.2,85 120.7,85.5 129.2,85.5 129.8,84.9 132,84.9 132.2,85.1 U2.27
  Top Layer w0.5: 117.75,83.3 119.8,83.3
VIDEO: Conn3.3 IC1.1 | length 6.5
  Bottom Layer w0.3: Conn3.3 137.82,75.817 IC1.1
WS_2812B: LED2.4 U2.32 | length 7.7
  Top Layer w0.2: U2.32 140.2,86.1 141.3,87.2 LED2.4
pads on no net: LED1.0 LED2.2 R1.0 R2.0 R3.0 R4.0 R5.0 R6.0 R7.0 R8.0 R9.0 R10.0 R11.0 R12.0 R13.0 R14.0 R15.0 U2.2 U2.9 U2.10 U2.11 U2.12 U2.13 U2.19 U2.22 U2.23 U2.24 U2.25 U2.26 U2.31 U3.4 U3.5 U3.7 U3.9 U3.12

## Polygon pours and split planes (outlines as drawn)
GND on Bottom Layer "GND" (solid, pour order 2): 117.6,106.5 145.6,106.5 145.6,74.5 145.6,73.1 138.9,73.1 138.9,74.5 117.6,74.5
GND on Top Layer "GND" (solid, pour order 3): 145.6,106.7 131.8,106.7 131.8,96.2 134,96.2 145.6,96.2 145.6,96.3
PGND on Top Layer "PGND" (solid, pour order 5): 132.2,82.4 130.9,83.9 126,83.9 125.7,84.2 123.7,84.2 123.7,82.5 123.8,82.4
NetC1_2 on Top Layer "SW_Node" (solid, pour order 7): 128.8,82.1 124.7,82.1 123.9,81.3 123.8,81.2 123.8,79.8 124.9,79.8 125,79.9 125,80.8 125,81 125.3,81.3 128.8,81.3
BATT+ on Top Layer "Batt+" (solid, pour order 9): 128.8,80.1 127,80.1 126.9,80 126.7,79.8 126.7,77.1 126.7,77 127.7,76 127.9,75.8 128.8,75.8

## Keep-outs
Keep-Out Layer:
  the board outline again, w0.2

## Silkscreen, mask and mechanical layers (free items; w line width, h text height)
Top Overlay:
  text "Toni B." at 143.5,100 h1 r90
  text "Rev 1" at 145,100 h1 r90
Top Solder:
  region: 119.4,82.55 117.4,82.55 117.4,81.95 119.4,81.95
  region: 119.4,83.6 117.4,83.6 117.4,83 119.4,83
  region: 119.4,84.8 117.4,84.8 117.4,84.2 119.4,84.2

## Text inside footprints (layer, text, board x,y; h text height)
U1: Top Overlay "*" at 134.175,78.76 h0.8 r180